# EAGLE board PCB 1.5 TH (EAGLE 6.5.0)
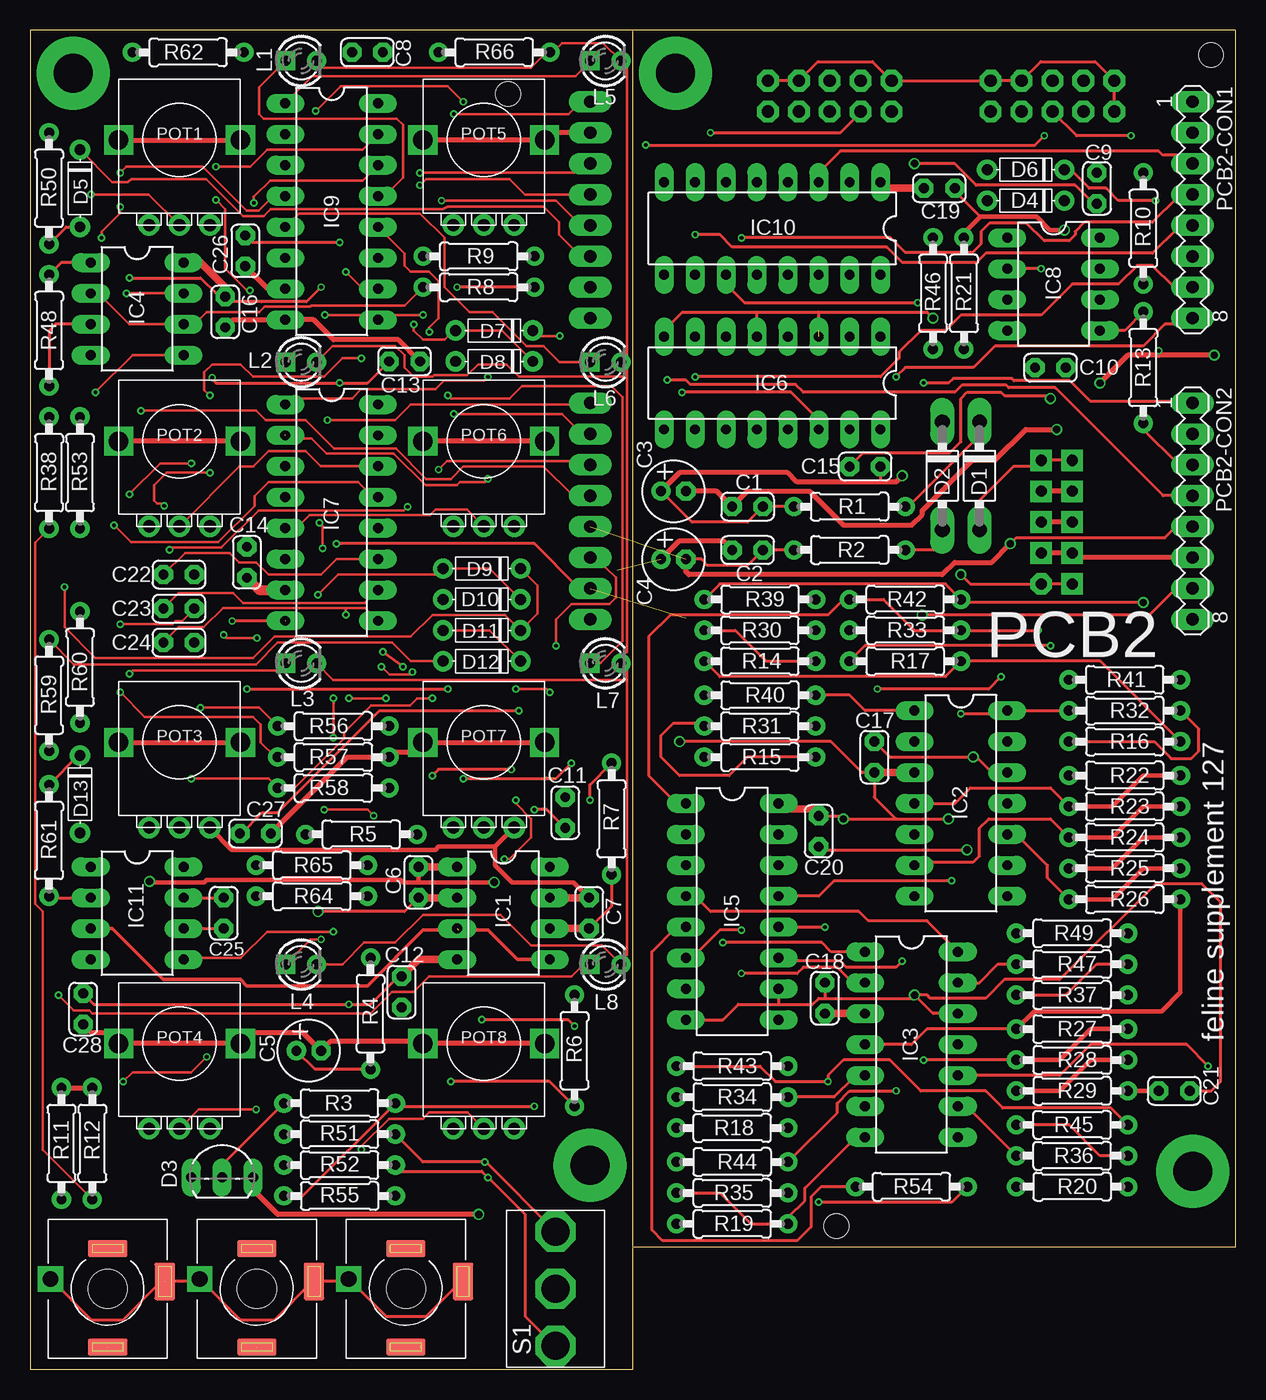
[diagram p0: board, top side]
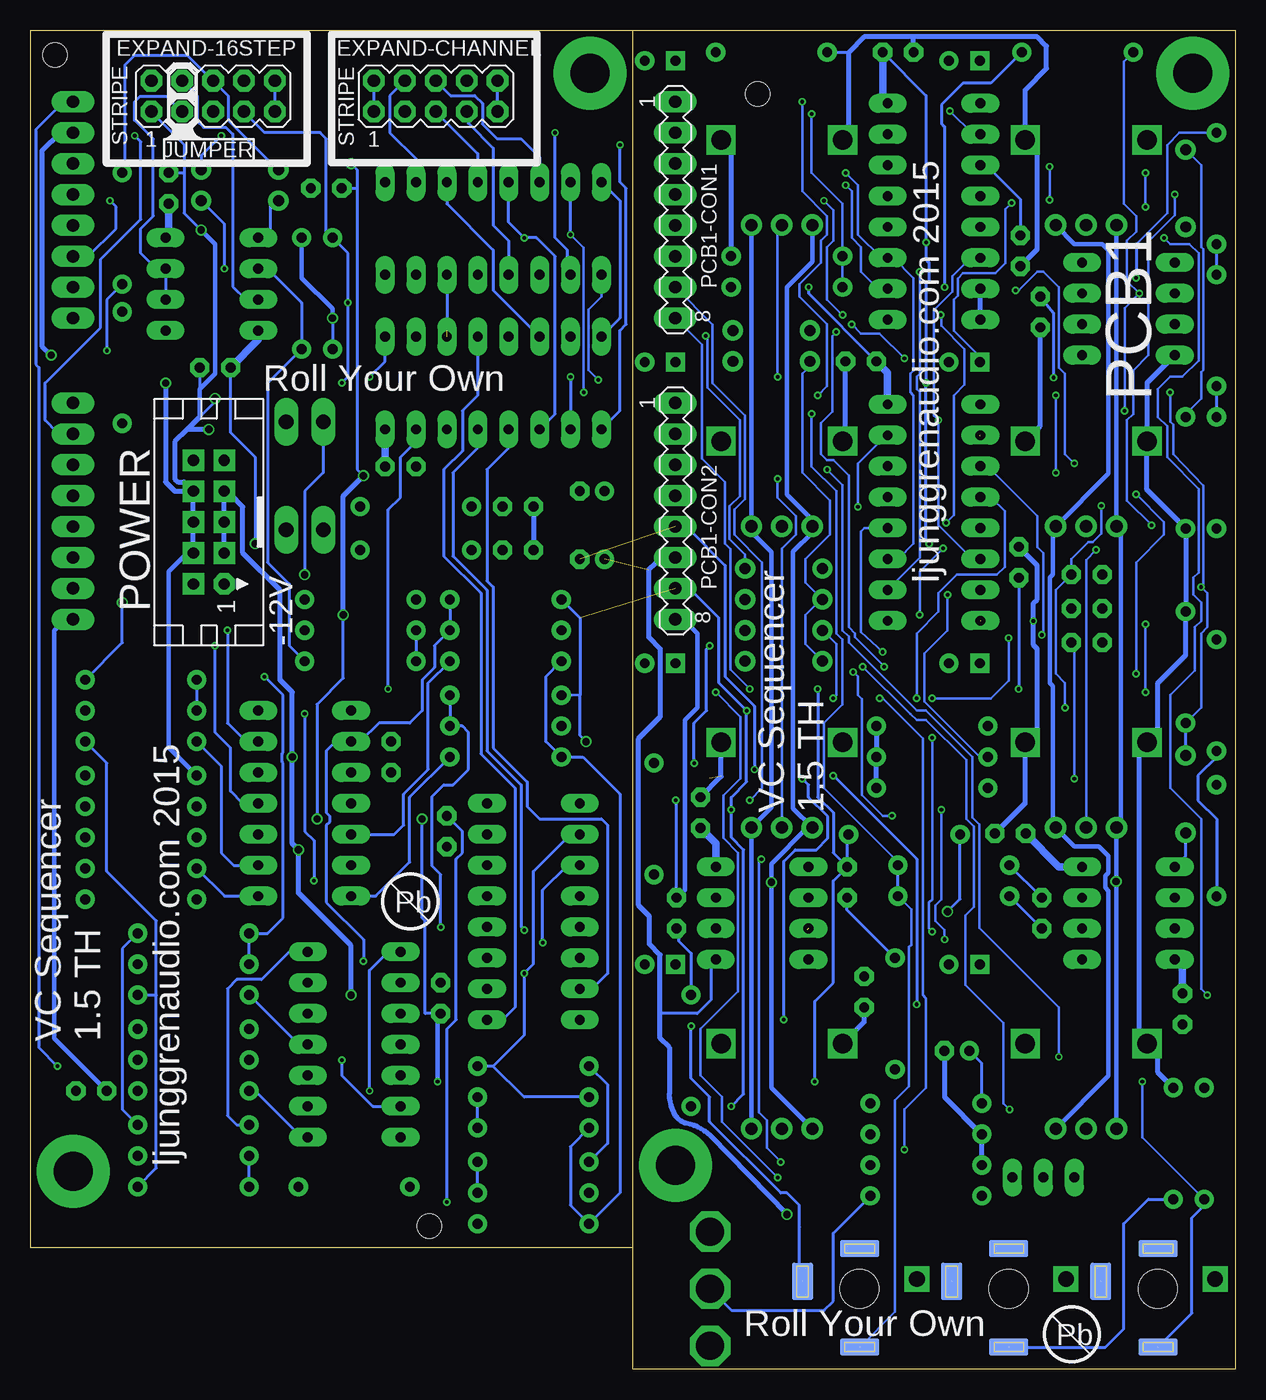
[diagram p1: board, bottom side, seen from below]

Size 99 x 110 mm. Coordinates in mm from the lower left corner, seen from the top.
Outline: 49.5,10 49.5,0 0,0 0,110 49.5,110
Outline: 49.5,10 49.5,110
Outline: 49.5,110 99,110 99,10 49.5,10
Copper layers (1*16): Top 0.035mm / dielectric 1.5mm / Bottom 0.035mm
Design rules "hackvana 15 mil pads 24 mil thermal": minimum track width 6mil, minimum drill 0.3mm, track to track 6mil, track to pad 6mil, pad to pad 6mil, via to via 6mil, smd to smd 0mil, copper to edge 6mil, drill to drill 6mil, minimum pad ring 15mil, minimum via ring 6mil, stop-mask expansion 2mil, vias tented up to drill 100mil, thermal gap 24mil
Holes 3.2 mm at 6.36,6.6 18.61,6.6 30.87,6.6
Holes 2 mm at 97,108 66.23,11.75 39.25,104.78

## Footprints (pad centres in the part's own frame; a part is rotated, then mirrored left to right if it is on the bottom)
C025-024X044 = drill 0.813 octagon: 1 -1.27,0; 2 1.27,0
E2-5 = drill 0.813 pad 1.27: + -1.016,0 | drill 0.813 pad 1.27 octagon: - 1.016,0
ERTHENVAR-SLOTS = smd 3.2 x 1.4 bottom: NORMLB 0,-3.3; TIPB 0,4.8 | smd 3.2 x 1.4: NORMLT 0,-3.3; TIPT 0,4.8 | smd 1.7 x 3.1 bottom: RING1B -4.7,-0.6 | smd 1.7 x 3.1: RING1T -4.7,-0.6 | drill 1.3 pad 1.778 square: RING2H 4.7,-0.8
DO41-7 = drill 1.2 pad 1.6 long: A 4.445,0; C -4.445,0
TO92-LINE = drill 0.813 long: 1 2.54,0; 2 0,0; 3 -2.54,0
DO35-6 = drill 0.9: ANODE 3.175,0; CATHODE -3.175,0
MA05-2 = drill 1.016 octagon: 1 -5.08,-1.27; 2 -5.08,1.27; 3 -2.54,-1.27; 4 -2.54,1.27; 5 0,-1.27; 6 0,1.27; 7 2.54,-1.27; 8 2.54,1.27; 9 5.08,-1.27; 10 5.08,1.27
DIL08 = drill 0.813 pad 1.27 long: 1 -3.81,-3.81; 2 -1.27,-3.81; 3 1.27,-3.81; 4 3.81,-3.81; 5 3.81,3.81; 6 1.27,3.81; 7 -1.27,3.81; 8 -3.81,3.81
DIL14 = drill 0.813 long: 1 -7.62,-3.81; 2 -5.08,-3.81; 3 -2.54,-3.81; 4 0,-3.81; 5 2.54,-3.81; 6 5.08,-3.81; 7 7.62,-3.81; 8 7.62,3.81; 9 5.08,3.81; 10 2.54,3.81; 11 0,3.81; 12 -2.54,3.81; 13 -5.08,3.81; 14 -7.62,3.81
DIL16 = drill 0.813 long: 1 -8.89,-3.81; 2 -6.35,-3.81; 3 -3.81,-3.81; 4 -1.27,-3.81; 5 1.27,-3.81; 6 3.81,-3.81; 7 6.35,-3.81; 8 8.89,-3.81; 9 8.89,3.81; 10 6.35,3.81; 11 3.81,3.81; 12 1.27,3.81; 13 -1.27,3.81; 14 -3.81,3.81; 15 -6.35,3.81; 16 -8.89,3.81
LED3MM = drill 0.813 square: A -1.27,0 | drill 0.813: K 1.27,0
MA08-1 = drill 1.016 long: 1 -8.89,0; 2 -6.35,0; 3 -3.81,0; 4 -1.27,0; 5 1.27,0; 6 3.81,0; 7 6.35,0; 8 8.89,0
POT-ALPHA9 = drill 1.6 pad 2.184 square: GND$1 -5,0; GND$2 5,0 | drill 1: LEFT -2.5,-7; MID 0,-7; RIGHT 2.5,-7
CON10L = drill 0.914 pad 1.778 octagon: 1 5.08,1.27 | drill 0.914 pad 1.778 square: 2 5.08,-1.27; 3 2.54,1.27; 4 2.54,-1.27; 5 0,1.27; 6 0,-1.27; 7 -2.54,1.27; 8 -2.54,-1.27; 9 -5.08,1.27; 10 -5.08,-1.27
0207/9 = drill 0.813: 1 -4.58,0; 2 4.58,0
SPDT-HORIZONTAL-TOP-SUBMINI-MULTICOMP = drill 2.3 pad 3.1 octagon: 1 4.7,0; 2 0,0; 3 -4.7,0

## Placement (x,y rotation side)
C1  100nF  [C025-024X044]  58.94,70.87 180 top
C2  100nF  [C025-024X044]  58.94,67.31 0 top
C3  10uF  [E2-5]  52.84,72.14 0 top
C4  10uF  [E2-5]  52.84,66.55 0 top
C5  10uF  [E2-5]  22.87,26.16 0 top
C6  100nF  [C025-024X044]  31.88,40.01 270 top
C7  100nF  [C025-024X044]  45.92,37.47 270 top
C8  100nF  [C025-024X044]  27.69,108.2 0 top
C9  100nF  [C025-024X044]  87.64,97.03 270 top
C10  100nF  [C025-024X044]  83.83,82.3 0 top
C11  100nF  [C025-024X044]  43.95,45.72 270 top
C12  100nF  [C025-024X044]  30.49,30.99 270 top
C13  100nF  [C025-024X044]  30.74,82.8 180 top
C14  100nF  [C025-024X044]  17.79,66.29 90 top
C15  100nF  [C025-024X044]  68.59,74.17 0 top
C16  100nF  [C025-024X044]  16.01,86.87 90 top
C17  100nF  [C025-024X044]  69.35,50.29 270 top
C18  100nF  [C025-024X044]  65.29,30.48 270 top
C19  100nF  [C025-024X044]  74.68,97.03 180 top
C20  100nF  [C025-024X044]  64.78,44.2 90 top
C21  100nF  [C025-024X044]  93.99,22.86 180 top
C22  1nF  [C025-024X044]  12.2,65.28 180 top
C23  1nF  [C025-024X044]  12.2,62.48 180 top
C24  1nF  [C025-024X044]  12.2,59.69 180 top
C25  15pF  [C025-024X044]  15.88,37.47 270 top
C26  100nF  [C025-024X044]  17.66,91.88 90 top
C27  100nF  [C025-024X044]  18.49,44.01 180 top
C28  100nF  [C025-024X044]  4.33,29.59 270 top
CV/CLK-IN  ERTHENVAR_3.5MM_JACKSLOTS  [ERTHENVAR-SLOTS]  6.35,6.6 180 top
D1  1N5818  [DO41-7]  77.99,73.41 270 top
D2  1N5818  [DO41-7]  74.94,73.41 270 top
D3  LM4040 5V  [TO92-LINE]  15.76,15.75 0 top
D4  1N4148  [DO35-6]  81.8,96.01 180 top
D5  1N4148  [DO35-6]  4.07,97.03 270 top
D6  1N4148  [DO35-6]  81.8,98.55 180 top
D7  1N4148  [DO35-6]  38.11,85.34 180 top
D8  1N4148  [DO35-6]  38.11,82.8 180 top
D9  1N4148  [DO35-6]  37.09,65.79 180 top
D10  1N4148  [DO35-6]  37.09,63.25 180 top
D11  1N4148  [DO35-6]  37.09,60.71 180 top
D12  1N4148  [DO35-6]  37.09,58.17 180 top
D13  1N4148  [DO35-6]  4.07,47.24 270 top
EXPAND-16STEP  [MA05-2]  83.99,104.6 0 bottom
EXPAND-CHANNEL  [MA05-2]  65.69,104.6 0 bottom
IC1  LM358  [DIL08]  38.87,37.47 270 top
IC2  LM339  [DIL14]  76.46,46.48 270 top
IC3  LM339  [DIL14]  72.4,26.67 270 top
IC4  LM393  [DIL08]  8.77,87.12 270 top
IC5  4532N  [DIL16]  57.67,37.59 270 top
IC6  CD4516  [DIL16]  60.97,81.03 180 top
IC7  CD4051  [DIL16]  24.75,70.38 270 top
IC8  TL072  [DIL08]  84.08,89.15 270 top
IC9  CD4051  [DIL16]  24.75,95.12 270 top
IC10  4050N  [DIL16]  60.97,93.73 180 top
IC11  TL072  [DIL08]  8.77,37.47 270 top
L1  Amber  [LED3MM]  22.25,107.5 0 top
L2  Amber  [LED3MM]  22.25,82.75 0 top
L3  Amber  [LED3MM]  22.25,58 0 top
L4  Amber  [LED3MM]  22.25,33.25 0 top
L5  Amber  [LED3MM]  47.25,107.5 0 top
L6  Amber  [LED3MM]  47.25,82.75 0 top
L7  Amber  [LED3MM]  47.25,58 0 top
L8  Amber  [LED3MM]  47.25,33.25 0 top
OUT  ERTHENVAR_3.5MM_JACKSLOTS  [ERTHENVAR-SLOTS]  30.85,6.6 180 top
PCB1-CON1  [MA08-1]  46,95.25 270 bottom
PCB1-CON2  [MA08-1]  46,70.5 270 bottom
PCB2-CON1  [MA08-1]  95.5,95.25 270 top
PCB2-CON2  [MA08-1]  95.5,70.5 270 top
POT1  100K  [POT-ALPHA9]  12.25,101 0 top
POT2  100K  [POT-ALPHA9]  12.25,76.25 0 top
POT3  100K  [POT-ALPHA9]  12.25,51.5 0 top
POT4  100K  [POT-ALPHA9]  12.25,26.75 0 top
POT5  100K  [POT-ALPHA9]  37.25,101 0 top
POT6  100K  [POT-ALPHA9]  37.25,76.25 0 top
POT7  100K  [POT-ALPHA9]  37.25,51.5 0 top
POT8  100K  [POT-ALPHA9]  37.25,26.75 0 top
POWER  [CON10L]  84.34,69.6 270 bottom
R1  10R  [0207/9]  67.32,70.87 180 top
R2  10R  [0207/9]  67.32,67.31 180 top
R3  4.7K  [0207/9]  25.41,21.84 0 top
R4  27K  [0207/9]  27.95,29.21 270 top
R5  27K  [0207/9]  27.19,43.94 0 top
R6  27K  [0207/9]  44.71,26.16 270 top
R7  27K  [0207/9]  47.76,45.21 90 top
R8  100K  [0207/9]  36.84,88.9 0 top
R9  27K  [0207/9]  36.84,91.44 0 top
R10  1M  [0207/9]  91.45,93.73 90 top
R11  100K  [0207/9]  2.55,18.54 270 top
R12  100K  [0207/9]  5.09,18.54 270 top
R13  27K  [0207/9]  91.45,82.3 90 top
R14  2.2K  [0207/9]  59.95,58.17 0 top
R15  2.2K  [0207/9]  59.95,50.29 0 top
R16  2.2K  [0207/9]  89.92,51.56 180 top
R17  2.2K  [0207/9]  71.89,58.17 180 top
R18  2.2K  [0207/9]  57.67,19.81 0 top
R19  2.2K  [0207/9]  57.67,11.94 0 top
R20  2.2K  [0207/9]  85.61,14.99 180 top
R21  4.7K  [0207/9]  76.72,88.39 90 top
R22  2.2K  [0207/9]  89.92,48.77 180 top
R23  2.2K  [0207/9]  89.92,46.23 180 top
R24  2.2K  [0207/9]  89.92,43.69 180 top
R25  2.2K  [0207/9]  89.92,41.15 180 top
R26  2.2K  [0207/9]  89.92,38.61 180 top
R27  2.2K  [0207/9]  85.61,27.94 180 top
R28  2.2K  [0207/9]  85.61,25.4 180 top
R29  2.2K  [0207/9]  85.61,22.86 180 top
R30  1M  [0207/9]  59.95,60.71 0 top
R31  1M  [0207/9]  59.95,52.83 0 top
R32  1M  [0207/9]  89.92,54.1 180 top
R33  1M  [0207/9]  71.89,60.71 0 top
R34  1M  [0207/9]  57.67,22.35 180 top
R35  1M  [0207/9]  57.67,14.48 0 top
R36  1M  [0207/9]  85.61,17.53 0 top
R37  27K  [0207/9]  85.61,30.73 180 top
R38  27K  [0207/9]  1.53,73.66 90 top
R39  27K  [0207/9]  59.95,63.25 180 top
R40  27K  [0207/9]  59.95,55.37 180 top
R41  27K  [0207/9]  89.92,56.64 0 top
R42  27K  [0207/9]  71.89,63.25 0 top
R43  27K  [0207/9]  57.67,24.89 180 top
R44  27K  [0207/9]  57.67,17.02 180 top
R45  27K  [0207/9]  85.61,20.07 0 top
R46  1M  [0207/9]  74.18,88.39 90 top
R47  1M  [0207/9]  85.61,33.27 180 top
R48  1M  [0207/9]  1.53,85.34 90 top
R49  27K  [0207/9]  85.61,35.81 0 top
R50  27K  [0207/9]  1.53,97.03 90 top
R51  1M  [0207/9]  25.41,19.3 0 top
R52  1M  [0207/9]  25.41,16.76 0 top
R53  1M  [0207/9]  4.07,73.66 90 top
R54  100K  [0207/9]  72.4,14.99 0 top
R55  100K  [0207/9]  25.41,14.22 180 top
R56  100K  [0207/9]  24.9,52.83 0 top
R57  100K  [0207/9]  24.9,50.29 0 top
R58  100K  [0207/9]  24.9,47.75 0 top
R59  100K  [0207/9]  1.53,55.37 270 top
R60  100K  [0207/9]  4.07,57.66 90 top
R61  100K  [0207/9]  1.53,43.43 90 top
R62  27K  [0207/9]  12.96,108.2 0 top
R64  100K  [0207/9]  23.12,38.86 0 top
R65  1K  [0207/9]  23.12,41.4 0 top
R66  2.2K  [0207/9]  38.11,108.2 0 top
R-IN  ERTHENVAR_3.5MM_JACKSLOTS  [ERTHENVAR-SLOTS]  18.6,6.6 180 top
S1  SPDT on-off-on  [SPDT-HORIZONTAL-TOP-SUBMINI-MULTICOMP]  43.15,6.6 270 top

## Library data of the parts
C1-C28 CV/CLK-IN D1-D13 IC1-IC11 L1-L8 OUT POT1-POT8 R1-R62 R64-R66 R-IN S1 = Roll Your Own
EXPAND-16STEP EXPAND-CHANNEL PCB1-CON1 PCB1-CON2 PCB2-CON1 PCB2-CON2 POWER = Roll Your Own; OC_FARNELL: unknown; OC_NEWARK: unknown

## Nets
0V: C1.2 C2.1 C3.- C4.+ C5.- C8.1 C9.1 C10.2 C11.1 C12.2 C13.1 C14.2 C15.1 C16.1 C17.1 C18.1 C19.1 C20.1 C21.1 C26.1 C27.1 C28.2 CV/CLK-IN.RING1B CV/CLK-IN.RING1T CV/CLK-IN.RING2H D3.1 EXPAND-16STEP.1 EXPAND-16STEP.2 EXPAND-16STEP.8 EXPAND-16STEP.9 EXPAND-16STEP.10 EXPAND-CHANNEL.1 EXPAND-CHANNEL.2 EXPAND-CHANNEL.8 EXPAND-CHANNEL.9 EXPAND-CHANNEL.10 IC1.3 IC1.5 IC2.12 IC3.12 IC4.4 IC5.8 IC5.10 IC6.3 IC6.5 IC6.8 IC7.8 IC9.7 IC9.8 IC10.8 IC10.14 IC11.3 OUT.RING1B OUT.RING1T OUT.RING2H PCB1-CON1.2 PCB1-CON2.6 PCB2-CON1.2 PCB2-CON2.6 POT1.GND$1 POT1.GND$2 POT2.GND$1 POT2.GND$2 POT3.GND$1 POT3.GND$2 POT4.GND$1 POT4.GND$2 POT5.GND$1 POT5.GND$2 POT6.GND$1 POT6.GND$2 POT7.GND$1 POT7.GND$2 POT8.GND$1 POT8.GND$2 POWER.3 POWER.4 POWER.5 POWER.6 POWER.7 POWER.8 R9.2 R10.1 R11.1 R12.1 R21.2 R22.2 R46.1 R51.1 R52.1 R53.1 R56.2 R57.2 R58.2 R60.2 R66.1 R-IN.RING1B R-IN.RING1T R-IN.RING2H
5V_REF: C21.2 PCB2-CON2.8 R29.1
+5V: C7.1 IC1.7 PCB1-CON2.8 POT1.RIGHT POT2.RIGHT POT3.RIGHT POT4.RIGHT POT5.RIGHT POT6.RIGHT POT7.RIGHT POT8.RIGHT R7.2
+12V: C1.1 C3.+ C8.2 C9.2 C11.2 C13.2 C15.2 C16.2 C17.2 C18.2 C19.2 C20.2 C26.2 C27.2 IC1.8 IC2.3 IC3.3 IC4.8 IC5.16 IC6.16 IC7.16 IC8.8 IC9.3 IC9.16 IC10.1 IC11.8 PCB1-CON2.7 PCB2-CON2.7 R1.2 R3.2 R8.2 R39.2 R40.2 R41.2 R42.2 R43.2 R44.2 R45.2 R49.2 R50.2 R54.2 R55.2 R62.2
-5V: C6.1 C14.1 IC1.1 IC7.7 POT1.LEFT POT2.LEFT POT3.LEFT POT4.LEFT POT5.LEFT POT6.LEFT POT7.LEFT POT8.LEFT R5.2 R6.2
-12V: C2.2 C4.- C10.1 C12.1 C28.1 IC1.4 IC8.4 IC11.4 PCB1-CON2.5 PCB2-CON2.5 R2.2
BUS_A1: C22.2 IC7.11 IC9.11 PCB1-CON1.3
BUS_A2: IC6.6 IC10.3 PCB2-CON1.3
BUS_B1: C23.2 IC7.10 IC9.10 PCB1-CON1.4
BUS_B2: IC6.11 IC10.5 PCB2-CON1.4
BUS_C1: C24.2 IC7.9 IC9.9 PCB1-CON1.5
BUS_C2: IC6.14 IC10.7 PCB2-CON1.5
COMP_REF_1: IC4.2 IC4.6 PCB1-CON1.1 R8.1 R9.1
COMP_REF_2: IC3.10 PCB2-CON1.1
CV/CLK-IN: EXPAND-16STEP.3 IC8.6 IC8.7
CV/CLOCK-FROM-EXP: EXPAND-16STEP.4 IC8.3
CV/CLOCK-IN1: CV/CLK-IN.TIPB CV/CLK-IN.TIPT PCB1-CON2.3 R11.2
CV/CLOCK-IN2: PCB2-CON2.3 R13.1
DISABLE1: IC7.6 IC9.6 PCB1-CON2.1
DISABLE2: EXPAND-16STEP.7 IC10.11 PCB2-CON2.1 R46.2
N$1: D4.CATHODE IC8.2 R14.1 R15.1 R16.1 R17.1 R18.1 R19.1 R20.1 R21.1 R37.1
N$3: C25.2 IC11.6 R64.1
N$4: R12.2 R38.1 R-IN.TIPB R-IN.TIPT
N$5: D4.ANODE IC8.1
N$6: C7.2 IC1.6 R6.1 R7.1
N$7: IC8.5 R13.2
N$8: IC3.11 R37.2 R47.1
N$11: D8.ANODE D10.ANODE D12.ANODE R59.1
N$12: IC4.3 R38.2 R48.1
N$13: IC5.5 R54.1
N$14: D5.ANODE IC4.1 R48.2 R50.1
N$15: L1.K L2.K L3.K L4.K L5.K L6.K L7.K L8.K R66.2
N$16: IC2.2 IC5.11 R30.2 R39.1
N$17: IC3.13 IC6.15 R47.2 R49.1
N$18: IC7.4 POT8.MID
N$19: IC7.2 POT7.MID
N$20: IC7.5 POT6.MID
N$21: IC7.1 POT5.MID
N$22: IC7.12 POT4.MID
N$23: IC7.15 POT3.MID
N$24: IC7.14 POT2.MID
N$25: IC7.13 POT1.MID
N$26: IC2.5 R14.2 R30.1
N$27: D1.A POWER.9 POWER.10
N$28: D1.C R1.1
N$29: D2.A R2.1
N$30: R55.1 S1.2
N$31: C6.2 IC1.2 R4.1 R5.1
N$33: D2.C POWER.1 POWER.2
N$35: IC2.4 R22.1 R23.2
N$36: IC2.1 IC5.12 R31.2 R40.1
N$37: IC2.7 R15.2 R31.1
N$38: IC2.6 R23.1 R24.2
N$39: C5.+ D3.2 R3.1 R4.2
N$40: IC2.14 IC5.13 R32.2 R41.1
N$41: IC2.9 R16.2 R32.1
N$42: IC7.3 IC11.5
N$43: C22.1 D7.ANODE D8.CATHODE R56.1
N$44: IC2.8 R24.1 R25.2
N$45: IC2.13 IC5.1 R33.2 R42.1
N$46: IC2.11 R17.2 R33.1
N$47: IC2.10 R25.1 R26.2
N$48: C23.1 D9.ANODE D10.CATHODE R57.1
N$49: IC3.2 IC5.2 R34.2 R43.1
N$50: IC3.5 R18.2 R34.1
N$51: IC3.4 R26.1 R27.2
N$52: C24.1 D11.ANODE D12.CATHODE R58.1
N$53: IC3.1 IC5.3 R35.2 R44.1
N$54: IC3.7 R19.2 R35.1
N$55: D13.ANODE IC11.1
N$56: IC3.6 R27.1 R28.2
N$57: IC3.14 IC5.4 R36.2 R45.1
N$58: IC3.9 R20.2 R36.1
N$59: IC3.8 R28.1 R29.2
N$60: IC11.2 R59.2 R61.1
N$61: D7.CATHODE D9.CATHODE D11.CATHODE D13.CATHODE IC4.5 R60.1 R61.2
N$62: EXPAND-CHANNEL.4 IC10.2
N$63: EXPAND-CHANNEL.6 IC10.6
N$64: EXPAND-CHANNEL.5 IC10.4
N$65: EXPAND-CHANNEL.3 IC10.10
N$66: EXPAND-CHANNEL.7 IC10.12
N$93: C25.1 IC11.7 R65.1
OUT1: OUT.TIPB OUT.TIPT PCB1-CON2.2 R64.2 R65.2
OUT2: EXPAND-16STEP.5 PCB2-CON2.2
PE1: PCB1-CON1.8 R52.2 S1.1
PE2: IC6.1 PCB2-CON1.8
PRESET_A: IC5.9 IC6.4
PRESET_B: IC5.7 IC6.12
PRESET_C: IC5.6 IC6.13
RESET1: D5.CATHODE PCB1-CON1.6 R53.2
RESET2: D6.CATHODE IC6.9 PCB2-CON1.6
RESET-EXP: D6.ANODE EXPAND-16STEP.6 R10.2
STEP1: IC9.13 L1.A
STEP2: IC9.14 L2.A
STEP3: IC9.15 L3.A
STEP4: IC9.12 L4.A
STEP5: IC9.1 L5.A
STEP6: IC9.5 L6.A
STEP7: IC9.2 L7.A
STEP8: IC9.4 L8.A
TRIGS1: IC4.7 PCB1-CON2.4 R62.1
TRIGS2: IC10.9 PCB2-CON2.4
U/D1: PCB1-CON1.7 R51.2 S1.3
U/D2: IC6.10 PCB2-CON1.7

## Tracks (layer width: path | path; a pad name or v marks a point on that pad's centre or on a via)
0V  (via drill 0.3, 0.6)  (8 unrouted)
  Top 0.22: v43.19,59.44 43.19,61.59 44.46,62.87 47.57,62.87 48.11,63.41 48.11,65.05 46.41,66.69
  Top 0.254: CV/CLK-IN.RING2H 4.99,4.06 7.63,4.06 10.76,7.2 CV/CLK-IN.RING1T 13.7,7.2 R-IN.RING2H 17.24,4.06 20.07,4.06 23.21,7.2 R-IN.RING1T 25.95,7.2 OUT.RING2H 29.23,4.32 32.52,4.32 35.4,7.2 OUT.RING1T | 20.92,61.47 v16.58,61.47 | EXPAND-CHANNEL.10 EXPAND-CHANNEL.8 64.72,107.44 69.2,107.44 EXPAND-CHANNEL.2 EXPAND-16STEP.10 EXPAND-16STEP.8 83.02,107.44 87.5,107.44 EXPAND-16STEP.2 EXPAND-16STEP.1 | C19.1 75.95,96.77 78.05,94.68 | C15.1 68.46,75.31 75.57,75.31 76.46,76.2 76.46,79.76 76.97,80.26 79.76,80.26 80.02,80.01 83.57,80.01 v83.83,79.76 | IC6.8 52.08,85.34 53.6,86.87 59.7,86.87 | 59.7,86.87 64.78,86.87 | 64.78,86.87 73.67,86.87 v74.18,86.36 | IC6.5 59.7,86.87 | IC6.3 64.78,86.87 | R21.2 76.72,93.34 | v92.72,83.69 92.72,83.31 | C17.1 70.62,50.29 v77.48,50.29 77.73,50.29 79,49.02 IC2.12 | C20.1 65.03,42.67 v76.97,42.67 | IC3.12 74.18,29.21 v72.65,30.73 | C18.1 65.29,30.48 | 65.29,30.48 72.4,30.48 v72.65,30.73 | 65.29,30.48 64.78,30.48 64.27,29.97 61.48,29.97 | IC5.8 56.9,28.7 58.17,29.97 61.48,29.97 | IC5.10 61.48,29.97 | v72.65,30.73 73.67,30.73 73.92,30.48 78.49,30.48 80.02,32 84.59,32 92.46,39.88 96.27,39.88 97.8,38.35 97.8,23.62 97.04,22.86 C21.1 | v44.71,28.19 44.2,28.7 v37.09,28.7 | v35.57,48.51 43.19,48.51 v44.46,49.78 | 46.41,66.69 PCB1-CON2.6
  Top 0.3: IC1.5 40.01,33.66 37.6,36.07 35.19,36.07 | 34.93,36.07 32.27,36.07 27.69,31.5 17.79,31.5 17.28,32 10.93,32 6.74,36.2 IC11.3
  Top 0.35: v84.97,93.6 83.76,93.6 82.69,94.68 78.05,94.68 76.72,93.34
  Top 0.406: v36.84,12.7 20.33,12.7 18.23,14.8 18.23,16.19 D3.1 | IC1.3 34.93,36.07 | PCB1-CON1.2 42.93,101.6 42.33,101 POT5.GND$2 POT5.GND$1 | POT1.GND$1 POT1.GND$2 | C26.1 19.51,88.77 IC9.7 | C16.1 16.64,86.23 IC9.8 23.25,86.23 24.9,84.58 30.23,84.58 C13.1 | POT6.GND$2 POT6.GND$1 | POT2.GND$2 POT2.GND$1 | POT3.GND$1 POT3.GND$2 | C28.2 4.96,27.69 6.36,27.69 7.25,26.79 POT4.GND$1 POT4.GND$2 18.19,27.69 22.36,27.69 C5.- 24.65,26.92 32.08,26.92 POT8.GND$1 POT8.GND$2 | R11.1 R12.1 | POT7.GND$2 POT7.GND$1 31.42,50.67 29.85,50.67 R57.2 26.04,50.29 C27.1 | POWER.3 POWER.4 85.97,66.69 PCB2-CON2.6 | POWER.6 POWER.5 | POWER.8 POWER.7 | v97.29,83.31 92.72,83.31 90.18,83.31 v87.89,81.03 | C3.- 56.4,72.14 C1.2 58.94,72.14 64.02,72.14 66.81,69.34 72.4,69.34 73.29,70.23 73.29,70.55 77.42,74.68 79.26,74.68 81.8,77.22 v84.34,77.22 | C4.+ 53.35,68.07 56.9,68.07 C2.1
  Bottom 0.254: 18.23,16.19 D3.1 | EXPAND-CHANNEL.9 EXPAND-CHANNEL.10 | EXPAND-CHANNEL.1 EXPAND-CHANNEL.2 | EXPAND-16STEP.9 EXPAND-16STEP.10 | C10.2 85.1,80.52 | C9.1 86.37,98.3 | 86.37,98.3 86.37,95 v84.97,93.6 | EXPAND-16STEP.1 86.37,100.63 86.37,98.3 | v83.83,79.76 83.83,79.5 85.1,78.23 | IC10.8 50.55,96.01 50.55,86.36 IC6.8 | IC10.14 64.78,85.34 | v74.18,86.36 R46.1 | R10.1 92.72,87.88 v92.72,83.69 | 82.56,71.88 82.81,71.88 POWER.7 | 35.8,7.45 35.8,11.67 35.82,11.94 35.82,13.46 36.84,14.48 37.35,14.48 43.19,20.32 43.19,22.35 44.71,23.88 v44.71,28.19 | 43.06,33.66 43.06,30.35 44.2,29.21 47.25,29.21 | v37.09,28.7 37.09,41.72 36.14,42.67 34.42,42.67 33.47,43.62 33.47,45.4 35.06,46.99 35.06,48.01 v35.57,48.51 | v44.46,49.78 44.46,53.09 43.44,54.1 43.44,59.18 v43.19,59.44 | R66.1 31.76,108.2
  Bottom 0.35: R22.2 87.64,51.06 87.64,65.53 86.11,67.06 POWER.4 | 85.1,78.23 85.1,80.52 83.83,81.79 83.83,92.46 v84.97,93.6 | R21.2 76.72,89.66 74.18,87.12 v74.18,86.36
  Bottom 0.406: v36.84,12.7 43.12,19.18 arc-31 45.09,20.19 arc45 45.98,20.83 arc27 46.49,22.61 46.49,26.42 47.25,27.18 47.25,29.21 47.25,34.04 48.14,34.92 48.14,37.21 49.03,38.1 49.03,51.82 47.25,53.59 47.25,59.18 48.2,60.13 48.2,65.66 47.11,66.69 PCB1-CON2.6 | 35.8,7.45 OUT.RING1T | 43.06,33.66 IC1.5 | POT5.GND$1 31.76,101.49 31.76,108.2 30.49,109.47 26.42,109.47 | 26.42,109.47 16.26,109.47 15.5,108.71 15.5,106.87 17.25,105.13 POT1.GND$2 16.26,100.01 16.26,92.01 C26.1 | C8.1 26.42,109.47 | IC9.8 IC9.7 | POT5.GND$2 41.42,100.17 R9.2 | IC4.4 7.25,81.02 POT2.GND$1 7.25,72.26 R53.1 R60.2 4.07,58.67 6.36,56.39 6.36,52.39 POT3.GND$1 7.25,51.18 7.88,50.55 7.88,27.38 POT4.GND$1 7.2,26.75 6.36,25.91 6.36,24.39 R12.1 | POT2.GND$2 16.01,77.49 C16.1 | C14.2 16.26,66.04 16.26,63.25 16.58,62.93 v16.58,61.47 16.58,59.5 16.26,59.18 16.26,52.49 POT3.GND$2 17.25,46.51 C27.1 | R52.1 R51.1 23.88,22.35 C5.- | C12.2 30.49,28.51 POT8.GND$1 | R58.2 R57.2 R56.2 | C11.1 42.25,48.69 POT7.GND$2 | C13.1 32.01,76.49 POT6.GND$1 | POWER.3 POWER.5 POWER.7 | POWER.4 POWER.8 | PCB2-CON1.2 96.53,101.6 98.05,100.08 98.05,84.07 v97.29,83.31 | v87.89,81.03 87.89,72.9 87.13,72.14 POWER.8 | 85.1,78.23 86.11,77.22 | POWER.8 86.37,72.9 86.88,72.9 87.13,73.15 87.13,76.2 86.11,77.22 | C1.2 C2.1 | v84.34,77.22 86.11,77.22 | 82.56,71.88 81.54,70.87 81.54,67.06 78.49,64.01 78.49,56.64 77.48,55.63 v77.48,50.29 77.48,43.18 v76.97,42.67 76.97,39.12 72.65,34.8 v72.65,30.73
5V_REF
  Top 0.35: R29.1 C21.2
  Bottom 0.35: PCB2-CON2.8 95.64,61.47 96.27,61.47 97.04,60.71 97.04,27.18 C21.2
+5V  (via drill 0.3)
  Top 0.254: v45.98,46.74 45.98,48.01 R7.2
  Top 0.35: POT3.RIGHT 14.75,44.46 16.54,42.67 33.28,42.67 33.54,42.93 38.18,42.93 | POT7.RIGHT 38.18,42.93 | 38.18,42.93 38.18,41.4 39.57,40.01 44.65,40.01 C7.1
  Top 0.6: IC1.7 C7.1
  Bottom 0.254: C7.1 45.92,46.67 v45.98,46.74
  Bottom 0.35: PCB1-CON2.8 45.86,61.47 45.22,61.47 44.2,60.45 44.2,54.36 45.22,53.34 45.22,39.37 45.85,38.73 C7.1 | POT4.RIGHT 10.42,24.08 10.42,39.31 10.68,39.56 10.68,40.51 10.42,40.77 10.42,42.16 11.18,42.93 13.22,42.93 14.75,44.46 POT3.RIGHT 14.99,44.74 14.99,56.13 15.25,56.39 15.25,65.02 14.99,65.28 14.99,68.83 14.75,69.08 POT2.RIGHT 10.42,73.58 10.42,91.95 10.93,92.46 13.22,92.46 POT1.RIGHT | POT8.RIGHT POT7.RIGHT 38.11,46.14 38.11,67.12 39.76,68.77 POT6.RIGHT POT5.RIGHT
+12V  (via drill 0.3, 0.6)  (1 unrouted)
  Top 0.23: 18.99,87.69 22.68,87.69 22.8,87.82
  Top 0.254: R8.2 v35.06,88.9 | v14.93,81.47 15.25,81.03 v25.41,81.03 27.69,81.03 C13.2 | 18.99,87.69 16.45,87.69 16.01,88.01 C16.2 15.76,88.39 15.25,88.39 13.98,89.66 v8.14,89.66 | 22.8,87.82 v23.88,88.9 | C26.2 18.23,92.58 v25.41,92.58 | PCB1-CON2.7 45.89,64.26 44.97,64.26 41.41,67.82 v25.15,67.82 | C27.2 17.34,44.01 19.06,45.72 20.33,45.72 28.71,54.1 v40.14,54.1 | R55.2 22.37,14.22 R3.2 30.24,21.59 v41.41,21.59 | C11.2 42.43,45.97 v41.41,45.97 | R1.2 C1.1 58.94,69.6 54.36,69.6 C3.+ | C15.2 69.86,72.9 | C9.2 87.38,95.76 85.86,97.28 77.73,97.28 75.95,99.06 v72.65,99.06 | PCB2-CON2.7 94.13,64.15 91.96,61.98 76.46,61.98 | 76.46,61.98 v73.29,61.98 | 76.47,61.98 76.46,61.98 | v53.35,51.56 65.79,51.56 68.33,49.02 C17.2 69.35,46.99 71.13,45.21 | R39.2 56.65,64.52 75.2,64.52 R42.2 76.72,62.99 v91.45,62.99 | R54.2 75.71,13.72 v64.78,13.72 | R43.2 59.95,24.89 61.22,23.62 v65.54,23.62 65.54,24.13 66.81,25.4 70.62,25.4 73.16,22.86 78.49,22.86 79.89,21.46 88.79,21.46 R45.2 | 71.13,45.21 v66.81,45.21 66.56,45.47 C20.2 | 71.13,45.21 v75.45,45.21
  Top 0.406: C3.+ 53.35,73.66 62.24,73.66 63,72.9 69.86,72.9 71.13,72.9 v71.64,73.41
  Top 0.6: C16.2 16.01,88.9 13.98,90.93 IC4.8 | C19.2 70.37,97.03 IC10.1 | IC2.3 C17.2 | IC3.3 C18.2 | IC5.16 61.92,46.04 64.4,46.04 64.46,45.97 64.46,45.78 C20.2
  Bottom 0.22: 8.14,92.46 5.6,95 5.6,100.58 4.57,101.61 R50.2
  Bottom 0.254: v35.06,88.9 35.06,88.39 C13.2 | C16.2 14.93,86.81 v14.93,81.47 | R62.2 20.08,105.66 22.36,105.66 24.14,103.89 24.14,102.36 23.88,102.11 v23.88,88.9 | 8.14,92.46 v8.14,89.66 | IC9.3 20.82,98.81 20.33,98.81 17.66,96.14 C26.2 | C8.2 25.41,104.65 v25.41,92.58 25.41,91.19 25.15,90.93 25.15,89.41 25.41,89.15 v25.41,81.03 25.41,68.07 v25.15,67.82 | PCB1-CON2.7 45.6,63.75 44.46,63.75 42.43,61.72 42.43,56.39 v40.14,54.1 40.14,48.26 41.41,46.99 v41.41,45.97 41.41,43.69 40.39,42.67 40.39,22.61 v41.41,21.59 | C19.2 72.14,97.03 | 72.14,97.03 72.14,73.91 v71.64,73.41 | v72.65,99.06 72.14,98.55 72.14,97.03 | R39.2 53.86,61.73 53.86,55.36 | 53.86,55.36 R40.2 | v53.35,51.56 53.86,52.07 53.86,55.36 | R41.2 91.45,59.7 v91.45,62.99 | v73.29,61.98 73.29,56.77 75.45,54.61 v75.45,45.21 | v66.81,45.21 66.81,37.08 66.56,36.83 66.56,29.21 C18.2 65.54,28.96 | v64.78,13.72 64.78,27.94 64.02,28.7 64.02,41.91 63.51,42.42 63.51,44.2 C20.2 | R43.2 51.57,23.38 51.57,18.53 R44.2 | R49.2 91.45,34.55 91.45,21.34 R45.2
  Bottom 0.35: v65.54,23.62 65.54,28.96
  Bottom 0.406: v73.29,61.98 73.29,71.75 v71.64,73.41
  Bottom 0.6: IC7.16 28.56,81.89 C13.2 | C27.2 14.49,41.27 IC11.8 | IC1.8 42.68,43.18 C11.2 | IC9.16 28.96,104.41 C8.2 | IC6.16 C15.2 | IC8.8 87.64,93.22 C9.2
-5V  (via drill 0.3, 0.6)
  Top 0.254: v17.79,55.88 v34.3,55.88 | R6.2 42.67,23.62 v34.55,23.62
  Top 0.35: 9.85,40.01 14.3,40.01 14.49,40.2 30.42,40.2 30.61,40.01 32.01,40.01 | 32.01,40.01 v38.11,40.01 | C6.1 31.88,40.13 32.01,40.01
  Top 0.406: v9.79,40.07 9.85,40.01
  Top 0.6: IC1.1 C6.1
  Top 0.813: C14.1 18.78,64.03 IC7.7
  Bottom 0.254: C14.1 v17.79,55.88 | v34.3,55.88 34.3,46.99 33.03,45.72 33.03,42.42 C6.1 | R5.2 31.88,43.82 C6.1 | v34.55,23.62 34.55,30.23 33.03,31.75 33.03,40.13 C6.1
  Bottom 0.35: POT5.LEFT 34.75,90.99 36.84,88.9 36.84,71.85 34.75,69.76 POT6.LEFT 34.75,68.74 36.33,67.16 36.33,46.08 POT7.LEFT 35.01,44.5 35.19,44.45 38.11,41.52 v38.11,40.01 38.11,23.11 POT8.LEFT | 9.75,40.1 POT3.LEFT 9.41,44.84 9.41,68.83 9.75,69.18 POT2.LEFT POT1.LEFT | 9.79,19.79 v9.79,40.07
  Bottom 0.406: 9.75,40.1 v9.79,40.07 | POT4.LEFT 9.79,19.79
-12V  (via drill 0.3, 0.6)  (1 unrouted)
  Top 0.254: C28.1 5.21,29.97 v26.17,29.97 27.95,29.97 30.23,32.26 C12.1 | v39.51,49.28 33.54,49.28 v33.03,48.77 | R2.2 C2.2 58.94,66.04 55.63,66.04 55.13,66.55 C4.- | 95.39,69.34 PCB2-CON2.5 94.13,69.23 93.23,68.33 81.03,68.33 v80.53,67.82
  Top 0.406: C4.- 53.86,65.53 54.11,65.28 74.94,65.28 75.95,66.29 79,66.29 v80.53,67.82
  Top 0.6: C12.1 31.88,33.66 IC1.4
  Bottom 0.254: PCB1-CON2.5 45.86,69.09 44.97,69.09 41.92,66.04 41.92,56.9 39.51,54.48 v39.51,49.28 | v33.03,48.77 26.17,41.91 v26.17,29.97 | C10.1 82.56,76.96 80.53,74.93 v80.53,67.82
  Bottom 0.6: C28.1 4.33,33.27 4.71,33.66 IC11.4 | C10.1 80.27,84.58 IC8.4
BUS_A1  (via drill 0.3)
  Top 0.22: PCB1-CON1.3 45.24,98.3 v32.01,98.3 | C22.2 12.71,67.06 16.39,67.06 17.15,66.29 18.55,66.29 19.57,65.28 23.88,65.28 25.18,66.57 IC7.11
  Bottom 0.22: v32.01,98.3 31,97.28 31,93.22 29.09,91.31 IC9.11 28.07,91.31 26.42,89.66 26.42,82.04 26.68,81.79 26.68,80.26 26.42,80.01 26.42,67.82 27.69,66.55 27.95,66.55 27.97,66.57 IC7.11
BUS_A2
  Top 0.254: PCB2-CON1.3 94.8,99.76 93.03,99.76 92.72,100.08 66.56,100.08 64.78,98.3 IC10.3
  Bottom 0.254: IC10.3 64.78,95.76 60.97,91.95 60.97,88.65 IC6.6
BUS_B1  (via drill 0.3)
  Top 0.22: PCB1-CON1.4 40.65,96.52 39.38,97.79 32.52,97.79 v32.01,97.28 | C23.2 12.2,63.75 16.64,63.75 17.47,62.93 27.46,62.93 IC7.10 | v25.92,90.17 27.32,88.77 IC9.10
  Bottom 0.22: v32.01,97.28 31.5,96.77 31.5,92.96 30.74,92.2 30.74,90.17 29.47,88.9 28.69,88.9 IC9.10 | IC7.10 25.92,66.67 25.92,80.26 26.17,80.52 26.17,81.53 25.92,81.79 v25.92,90.17
BUS_B2  (via drill 0.3)
  Top 0.254: PCB2-CON1.4 95.25,96.27 94.24,96.27 92.21,94.23 86.62,94.23 85.86,93.47 85.86,93.22 85.35,92.71 83.32,92.71 81.86,94.17 78.81,94.17 78.11,93.47 78.11,92.46 77.42,91.76 71.89,91.76 70.68,92.96 v58.43,92.96
  Bottom 0.254: IC10.5 59.7,94.23 v58.43,92.96 57.41,92.96 55.89,91.44 55.89,78.49 IC6.11
BUS_C1  (via drill 0.3)
  Top 0.22: PCB1-CON1.5 45.22,93.98 43.19,96.01 v33.79,96.01 | v32.27,86.61 28.94,86.61 IC9.9 28.18,86.61 v24.2,86.61 | C24.2 12.2,60.96 14.23,60.96 15.82,62.55 25.92,62.55 | 25.92,62.55 27.5,62.55 IC7.9 | v23.76,69.53 24.01,69.28 v24.01,67.44 | v25.92,61.98 25.92,62.55
  Bottom 0.22: v33.79,96.01 33.03,95.25 33.03,92.71 33.54,92.2 33.54,87.88 v32.27,86.61 | v24.2,86.61 24.14,86.55 24.14,85.72 22.23,83.82 22.23,80.9 23.12,80.01 23.12,70.17 v23.76,69.53 | v24.01,67.44 25.92,65.53 v25.92,61.98
BUS_C2  (via drill 0.3)
  Top 0.254: PCB2-CON1.5 95.25,93.73 94.24,93.73 92.21,91.69 78.49,91.69 77.73,90.93 71.64,90.93 70.37,92.2 57.67,92.2 56.65,93.22 v54.62,93.22 | IC6.14 64.78,77.98 62.49,80.26 v53.54,80.26
  Bottom 0.22: v53.54,80.26 53.54,92.14 v54.62,93.22
  Bottom 0.254: v54.62,93.22 IC10.7
COMP_REF_1  (via drill 0.3)
  Top 0.22: PCB1-CON1.1 45.22,104.14 44.2,103.12 v34.81,103.12 | R8.1 30.73,87.38 23.06,87.38 23,87.31 19.25,87.31 18.8,86.87 14.49,86.87 13.47,85.85 IC4.6 8.14,85.85 5.85,88.14 5.21,88.14 IC4.2
  Bottom 0.22: v34.81,103.12 34.81,98.3 32.27,95.76 R9.1 R8.1
COMP_REF_2  (via drill 0.3)
  Top 0.254: v96.78,24.89 95,26.67 87.13,26.67 84.59,24.13 IC3.10
  Bottom 0.254: PCB2-CON1.1 95.75,103.89 96.53,103.89 98.56,101.85 98.56,82.55 98.31,82.3 98.31,26.42 v96.78,24.89
CV/CLK-IN
  Bottom 0.254: IC8.6 IC8.7 88.15,90.68 88.91,90.68 89.92,91.69 89.92,93.73 88.91,94.74 88.91,101.09 90.43,102.62 90.43,104.14 89.99,104.58 87.83,104.58 86.57,103.33 EXPAND-16STEP.3
CV/CLOCK-FROM-EXP
  Bottom 0.254: EXPAND-16STEP.4 85.29,104.63 85.29,102.55 84.78,102.04 82.94,102.04 82.37,101.47 82.37,88.96 81.29,87.88 IC8.3
CV/CLOCK-IN1  (via drill 0.3)  (1 unrouted)
  Top 0.22: PCB1-CON2.3 45.7,74.61 34.23,74.61 v33.54,73.91 | v14.49,25.65 13.22,24.38 8.39,24.38 v7.63,23.62
  Bottom 0.22: v33.54,73.91 32.27,72.64 32.27,60.71 31.76,60.2 31.76,59.69 26.17,54.1 25.41,54.1 21.6,50.29 21.6,45.34 21.03,44.77 21.03,36.26 14.49,29.72 v14.49,25.65 | v7.63,23.62 7.63,19.04 R11.2
  Bottom 0.254: CV/CLK-IN.TIPT 3.56,4.59 3.56,12.45 2.55,13.46 R11.2
CV/CLOCK-IN2
  Top 0.254: PCB2-CON2.3 94.35,74.31 91.45,77.22 R13.1
DISABLE1  (via drill 0.3)
  Top 0.22: PCB1-CON2.1 45.86,79.25 31.25,79.25 29.98,77.98 v24.39,77.98
  Bottom 0.22: IC7.6 21.17,66.8 21.85,66.8 24.39,69.34 v24.39,77.98 24.77,78.36 24.77,87 23.25,88.52 23.25,89.79 21.85,91.19 21.06,91.19 IC9.6
DISABLE2  (via drill 0.3)
  Top 0.254: PCB2-CON2.1 95.39,79.5 87.13,79.5 85.42,81.22 80.84,81.22 80.65,81.41 75.83,81.41 75.45,81.03 v73.41,81.03 | IC10.11 57.16,89.15 58.68,87.63 v72.91,87.63
  Bottom 0.254: v73.41,81.03 72.91,81.53 v72.91,87.63 72.91,91.69 R46.2 74.68,93.48 74.68,101.09 75.19,101.6 79.76,101.6 81.45,103.28 EXPAND-16STEP.7
N$1  (via drill 0.3)
  Top 0.254: v83.07,90.42 IC8.2 | R14.1 56.65,56.9 75.2,56.9 R17.1 87.9,58.17 R16.1
  Bottom 0.254: D4.CATHODE 83.07,94.11 v83.07,90.42 | IC8.2 79.51,90.42 76.72,87.63 R21.1 79.51,81.02 79.51,66.29 77.73,64.52 77.73,59.44 R17.1 | R14.1 56.65,56.9 56.65,51.57 R15.1 53.6,50.29 50.55,47.24 50.55,14.48 R19.1 54.62,13.46 54.62,18.28 R18.1 | R20.1 88.65,16.52 88.65,30.73 | R37.1 88.65,30.73 | 88.65,30.73 88.65,36.83 92.72,40.89 92.72,49.78 R16.1
N$3
  Top 0.254: IC11.6 C25.2
  Bottom 0.254: C25.2 R64.1
N$4  (1 unrouted)
  Top 0.22: R12.2 1.02,18.03 1.02,37.59 0.39,38.23 0.39,67.94 R38.1
  Bottom 0.254: R-IN.TIPT 18.58,1.78 10.68,1.78 9.15,3.3 9.15,11.94 7.13,13.96 R12.2
N$5
  Bottom 0.254: IC8.1 79.76,93.47 79.26,93.47 79.26,95.76 79,96.01 D4.ANODE
N$6
  Top 0.254: R7.1 47.76,38.04 C7.2
  Top 0.6: IC1.6 C7.2
  Bottom 0.254: C7.2 45.73,36.01 45.73,35.18 44.71,34.16 R6.1
N$7
  Top 0.254: R13.2 89.92,85.34 IC8.5
N$8
  Top 0.254: R37.2 85.1,30.73 87.64,33.27 R47.1
  Bottom 0.254: IC3.11 76.96,26.67 R37.2
N$11
  Top 0.22: R59.1 3.57,57.91 18.55,57.91 20.33,59.69 29.73,59.69 31.25,58.17 D12.ANODE
  Bottom 0.22: D12.ANODE 35.31,59.56 35.31,61.98 34.04,63.25 D10.ANODE 35.31,64.64 35.31,66.55 33.28,68.58 33.28,71.37 35.57,73.66 35.57,81.79 34.93,82.42 D8.ANODE
N$12
  Top 0.254: IC4.3 2.04,85.85 1.53,85.34 R48.1
  Bottom 0.254: R38.2 R48.1
N$13
  Top 0.254: R54.1 64.97,14.99 64.14,14.16 64.14,11.68 63,10.54 51.95,10.54 51.06,11.43 51.06,34.29 53.09,36.32 IC5.5
N$14
  Top 0.254: R50.1 2.94,93.85 D5.ANODE | IC4.1 2.54,90.93 R48.2
  Bottom 0.254: R48.2 R50.1
N$15
  Top 0.22: L4.K 25.64,33.25 27.44,35.05 29.98,35.05 32.27,37.34 38.62,37.34 41.16,34.8 46.97,34.8 L8.K 48.52,33.53 49.03,34.04 49.03,56.64 | 49.03,56.64 49.03,57.49 L7.K 48.52,58.42 49.03,58.93 49.03,81.53 | L1.K 24.09,106.93 41.16,106.93 42.43,108.2 R66.2 42.93,108.2 43.7,108.97 47.05,108.97 L5.K 49.03,106.99 49.03,83.31 48.52,82.8 L6.K 49.03,82.24 49.03,82.04 49.03,81.53 | L2.K 24.84,84.07 29.98,84.07 30.74,83.31 30.74,82.3 31.5,81.53 33.03,81.53 33.16,81.66 35.89,81.66 36.77,82.55 39.12,82.55 40.14,81.53 49.03,81.53 | L3.K 24.88,56.64 49.03,56.64
N$16  (via drill 0.3)
  Top 0.254: v71.64,33.53 71.13,33.02 67.06,33.02 66.56,33.53 62.49,33.53 62.24,33.78 IC5.11
  Bottom 0.254: R39.1 R30.2 65.79,59.44 65.79,57.66 66.81,56.64 66.81,54.1 67.83,53.09 70.37,53.09 71.89,51.56 IC2.2 73.92,51.56 74.68,50.8 74.68,45.72 74.43,45.47 74.43,44.96 74.68,44.7 74.68,38.35 71.64,35.31 v71.64,33.53
N$17  (via drill 0.3)
  Top 0.254: IC3.13 77.99,31.75 79.51,33.27 R47.2 | v79.76,56.9 78.75,55.88 v69.6,55.88
  Bottom 0.254: R47.2 R49.1 79.51,35.81 78.24,37.08 78.24,49.78 78.3,49.85 78.3,50.61 78.24,50.67 78.24,55.37 v79.76,56.9 | v69.6,55.88 69.6,70.61 68.59,71.63 68.59,74.93 67.32,76.2 IC6.15
N$18  (via drill 0.3)
  Top 0.22: POT8.MID 35.92,21.08 32.77,21.08 32.27,20.57 29.47,20.57 27.19,18.29 v27.19,18.03 | v29.22,55.12 v26.17,55.12
  Bottom 0.22: v27.19,18.03 27.19,21.34 25.41,23.11 25.41,30.48 25.66,30.73 25.66,51.82 28.96,55.12 v29.22,55.12 | v26.17,55.12 26.17,60.45 24.39,62.23 24.39,63.75 22.87,65.28 19.57,65.28 18.93,65.91 18.93,70.48 20.07,71.63 20.92,71.63 IC7.4
N$19  (via drill 0.3)  (1 unrouted)
  Top 0.22: v37.6,73.15 37.35,72.9 35.31,72.9 35.06,72.64 32.46,72.64 29.85,75.25 24.33,75.25 23.12,76.45 21.22,76.45 20.96,76.71
  Bottom 0.22: POT7.MID 37.25,67.41 36.08,68.58 36.08,70.1 37.6,71.63 v37.6,73.15
N$20
  Top 0.22: POT6.MID 35.89,70.61 33.28,70.61 32.84,70.17 22.93,70.17 21.87,69.11 IC7.5
N$21  (via drill 0.3)
  Top 0.22: IC7.1 21.43,79.76 26.42,79.76 27.19,80.52 33.28,80.52 33.98,81.22 37.28,81.22 v37.6,81.53
  Bottom 0.22: v37.6,81.53 37.6,93.65 POT5.MID
N$22  (via drill 0.3)
  Top 0.22: POT4.MID 13.84,21.34 v18.55,21.34 | v30.61,57.72 v28.96,58.93
  Bottom 0.22: v18.55,21.34 19.06,21.84 19.06,28.45 22.17,31.56 22.17,37.27 21.47,37.97 21.47,44.58 22.11,45.21 22.11,50.04 25.41,53.34 26.17,53.34 26.68,53.85 v30.61,57.72 | v28.96,58.93 30.74,60.58 30.74,68.83 30.47,69.11 IC7.12
N$23  (via drill 0.3)
  Top 0.22: v11.44,67.31 11.63,67.5 15.69,67.5 18.74,70.55 30.68,70.55 v31,70.87
  Bottom 0.22: POT3.MID 12.25,66.5 v11.44,67.31 | v31,70.87 31,74.42 28.96,76.45 28.84,76.45 IC7.15
N$24
  Top 0.22: POT2.MID 17.17,74.17 18.3,74.17 19.57,75.44 22.61,75.44 23.86,74.19 IC7.14
N$25  (via drill 0.3)
  Top 0.22: POT1.MID 9.73,96.52 v4.96,96.52 | v6.87,69.34 8.26,67.94 15.44,67.94 18.42,70.93 18.42,71.75 19.57,72.9 26.93,72.9 28.18,71.65 IC7.13
  Bottom 0.22: v4.96,96.52 4.96,94.81 7.12,92.65 7.12,83.31 8.39,82.04 8.39,78.49 8.9,77.98 8.9,71.37 v6.87,69.34
N$26
  Top 0.254: R30.1 57.92,60.71 60.46,58.17 R14.2
  Bottom 0.254: IC2.5 69.1,43.94 68.33,44.7 68.33,47.24 66.3,49.28 66.3,56.39 64.53,58.16 R14.2
N$27
  Top 0.254: POWER.10 POWER.9 82.56,74.17 80.78,74.17 77.99,71.37 D1.A
N$28
  Top 0.254: D1.C 77.73,77.6 77.73,76.45 72.14,70.87 R1.1
N$29
  Top 0.254: D2.A 74.94,67.82 74.43,67.31 R2.1
N$30
  Bottom 0.254: S1.2 41.38,4.83 33.79,4.83 33.03,5.59 33.03,11.18 R55.1
N$31  (via drill 0.6)
  Top 0.254: C6.2 30.74,37.59 v23.63,37.59
  Top 0.6: C6.2 IC1.2
  Bottom 0.254: R4.1 31.88,37.73 C6.2 | v23.63,37.59 22.61,38.62 R5.1
N$33  (via drill 0.6)
  Top 0.254: POWER.2 POWER.1 77.22,64.52 v76.46,65.28
  Bottom 0.254: D2.C 74.94,73.66 76.46,72.14 v76.46,65.28
N$35
  Top 0.254: IC2.4 75.95,46.48 77.22,47.75 83.83,47.75 R23.2
  Top 0.35: R23.2 88.91,46.23 91.45,48.77 R22.1
N$36  (via drill 0.3)
  Top 0.254: IC2.1 68.59,54.1 67.32,55.37 R40.1 | IC5.12 v65.29,36.32
  Bottom 0.254: R40.1 R31.2 63.51,52.83 63,52.32 63,49.28 64.27,48.01 65.03,48.01 65.98,47.05 65.98,41.34 65.29,40.64 v65.29,36.32
N$37
  Top 0.254: R15.2 58.94,50.29 57.41,48.77 53.35,48.77 51.82,50.29 51.82,52.07 52.84,53.09 55.12,53.09 R31.1
  Bottom 0.254: IC2.7 70.62,38.86 67.83,41.66 67.83,47 R15.2
N$38
  Top 0.254: IC2.6 72.91,41.66 77.48,41.66 77.99,42.16 77.99,44.45 78.75,45.21 83.83,45.21 R24.2
  Top 0.35: R24.2 88.91,43.69 91.45,46.23 R23.1
N$39
  Top 0.254: R4.2 23.38,24.63 C5.+ | D3.2 15.76,16.77 R3.1
  Bottom 0.254: R3.1 20.83,25.14 C5.+
N$40  (via drill 0.3)
  Top 0.254: R32.2 IC2.14 80.02,53.85 v76.46,53.85 | v75.7,40.13 66.05,40.13 64.78,38.86 IC5.13
  Bottom 0.254: R41.1 R32.2 | v76.46,53.85 76.46,44.2 75.7,43.43 v75.7,40.13
N$41
  Top 0.254: R16.2 92.34,51.56 93.73,50.16 95.39,50.16 96.02,50.8 96.02,52.59 R32.1
  Bottom 0.254: R16.2 83.32,49.54 83.32,42.42 82.3,41.4 IC2.9
N$42  (via drill 0.3)
  Top 0.22: v15.88,60.33 16.14,60.07 v18.61,60.07 | v24.9,55.12 v24.9,51.88 | v24.9,35.94 19.44,35.94 17.28,33.78 12.71,33.78 IC11.5
  Bottom 0.22: IC7.3 20.92,74.17 20.33,74.17 16.26,70.1 16.26,67.56 15.76,67.06 15.76,60.45 v15.88,60.33 | v18.61,60.07 18.61,56.58 20.07,55.12 v24.9,55.12 | v24.9,51.88 24.9,38.61 25.15,38.35 25.15,36.2 v24.9,35.94
N$43  (via drill 0.3)
  Top 0.22: D8.CATHODE 38.74,85.34 D7.ANODE 34.81,85.34 34.04,84.58 32.27,84.58 31.5,85.34 v31.5,85.85 | v10.99,70.93 10.8,71.12 10.42,71.12 10.17,71.37 10.17,72.64 11.18,73.66 v14.74,73.66 | v14.74,80.01 14.3,80.45 14.3,81.92 14.93,82.55 17.28,82.55 18.3,81.53 24.14,81.53 25.66,83.06 v27.19,83.06 | v13.98,54.36 18.8,54.36 R56.1
  Bottom 0.22: v10.99,70.93 10.99,68.64 11.69,67.94 12.07,67.94 13.47,66.55 C22.1 14.74,64.01 14.74,57.15 13.98,56.39 v13.98,54.36 | v14.74,73.66 v14.74,80.01 | v27.19,83.06 29.22,85.09 30.74,85.09 v31.5,85.85
N$44
  Top 0.35: R25.2 88.91,41.15 91.45,43.69 R24.1
  Bottom 0.254: R25.2 83.06,38.86 IC2.8
N$45  (via drill 0.3)
  Top 0.254: v82.81,60.71 R33.2 72.65,60.71 70.11,63.25 R42.1 66.81,63.25 65.54,61.98 52.59,61.98 50.81,60.2 50.81,48.77 53.09,46.48 IC5.1
  Bottom 0.254: v82.81,60.71 82.81,53.09 81.29,51.56 IC2.13
N$46  (via drill 0.3)
  Top 0.254: v83.83,59.44 68.58,59.44 R17.2
  Bottom 0.254: R33.1 R17.2 | IC2.11 81.54,46.48 82.56,47.5 82.56,51.05 83.83,52.32 v83.83,59.44
N$47
  Top 0.254: R26.2 83.57,40.38 83.57,41.4 81.03,43.94 IC2.10
  Top 0.35: R26.2 88.91,38.61 91.45,41.15 R25.1
N$48  (via drill 0.3)
  Top 0.22: D10.CATHODE 37.73,65.79 D9.ANODE 33.41,65.28 25.28,65.28 v23.63,63.63 | C23.1 12.45,61.47 11.95,61.47 11.69,61.21 v7.37,61.21 | v7.37,55.63 9.41,53.59 18.3,53.59 18.93,52.96 18.93,51.5 20.14,50.29 R57.1
  Bottom 0.22: v7.37,61.21 v7.37,55.63 | v23.63,63.63 23.63,60.71 25.54,58.8 25.54,54.86 20.96,50.29 R57.1
N$49  (via drill 0.3)
  Top 0.254: IC3.2 68.33,32 67.32,32 66.3,33.02 63.51,33.02 63,32.51 v58.43,32.51
  Bottom 0.254: R34.2 58.43,22.35 60.97,24.89 | 60.97,24.89 R43.1 | 60.97,24.89 58.43,27.43 v58.43,32.51 57.67,33.27 57.67,40.89 54.62,43.94 IC5.2
N$50
  Top 0.254: IC3.5 68.33,23.88 67.57,23.88 66.05,22.35 R34.1
  Bottom 0.254: R18.2 R34.1
N$51
  Top 0.254: R27.2 73.67,27.94 72.4,26.67 IC3.4
  Top 0.35: R27.2 82.49,29.4 92.97,29.4 94.5,30.93 R26.1
N$52  (via drill 0.3)
  Top 0.22: D12.CATHODE 37.73,60.71 D11.ANODE | v13.22,48.51 19.56,48.51 R58.1 21.73,47.75 25.79,51.82 25.79,52.32 28.01,54.55 31.19,54.55 31.76,55.12 v33.03,55.12
  Bottom 0.22: v13.22,48.51 13.22,59.44 C24.1 | D11.ANODE 32.77,59.56 32.77,55.37 v33.03,55.12
N$53  (via drill 0.3)
  Top 0.254: R44.1 66.3,21.07 66.3,21.84 67.32,22.86 v71.13,22.86 | IC3.1 65.79,34.29 65.03,35.05 v56.9,35.05
  Bottom 0.254: R35.2 R44.1 | v71.13,22.86 71.13,32.77 69.6,34.29 IC3.1 | v56.9,35.05 56.9,39.37 54.87,41.4 IC5.3
N$54
  Top 0.254: R35.1 56.65,14.48 59.19,11.94 R19.2 62.25,12.45 63.64,13.84 63.64,14.86 67.57,18.8 68.33,18.54 68.33,18.8 IC3.7
N$55
  Bottom 0.254: IC11.1 4.07,42.16 D13.ANODE
N$56  (via drill 0.3)
  Top 0.254: R28.2 v73.41,25.4
  Top 0.35: R28.2 84.59,25.4 87.13,27.94 R27.1
  Bottom 0.254: v73.41,25.4 73.41,24.13 70.87,21.59 IC3.6
N$57
  Top 0.254: R36.2 87.89,17.53 85.35,20.07 R45.1 | IC3.14 73.67,36.83 68.84,36.83 68.08,37.59 55.89,37.59 54.62,38.86 IC5.4
  Bottom 0.254: IC3.14 77.73,34.29 80.02,32 82.05,32 82.81,31.24 82.81,20.83 82.05,20.07 R45.1
N$58
  Top 0.254: R36.1 76.96,21.59 IC3.9
  Bottom 0.254: R20.2 R36.1
N$59
  Top 0.35: R29.2 84.59,22.86 87.13,25.4 R28.1
  Bottom 0.254: IC3.8 76.72,19.05 80.53,22.86 R29.2
N$60
  Top 0.254: R61.1 1.65,38.73 IC11.2
  Bottom 0.254: R59.2 1.53,50.29 3.06,48.77 3.06,46.74 1.53,45.21 R61.1
N$61  (via drill 0.3)
  Top 0.22: v5.34,80.26 8.39,83.31 IC4.5 | D7.CATHODE 41.73,84.9 v43.51,84.9 | D9.CATHODE 41.66,64.39 41.66,62.1 D11.CATHODE 39,61.98 33.03,61.98 31.25,60.2 20.07,60.2 18.3,58.42 5.34,58.42 2.8,60.96 v2.8,64.26
  Top 0.254: R61.2 3.94,50.42 D13.CATHODE
  Bottom 0.22: R60.1 2.8,54.35 2.8,60.45 2.29,60.96 2.29,63.75 v2.8,64.26 2.61,64.52 2.61,72.58 5.09,75.18 5.09,77.6 5.34,77.85 v5.34,80.26 | v43.51,84.9 43.38,84.77 43.38,80.64 40.71,77.98 40.71,71.75 41.54,70.93 41.54,68.2 40.27,66.93 D9.CATHODE
  Bottom 0.254: D13.CATHODE R60.1
N$62
  Bottom 0.254: EXPAND-CHANNEL.4 69.48,104.62 69.48,101.6 67.32,99.44 IC10.2
N$63
  Bottom 0.254: EXPAND-CHANNEL.6 64.47,104.65 62.49,104.65 61.86,104.01 61.86,102.3 60.65,101.09 58.68,101.09 57.16,99.57 IC10.6
N$64
  Bottom 0.254: EXPAND-CHANNEL.5 62.24,99.88 IC10.4
N$65  (via drill 0.3)
  Top 0.254: v55.89,101.6 66.56,101.6 68.23,103.27 EXPAND-CHANNEL.3
  Bottom 0.254: IC10.10 54.87,90.17 54.87,91.95 55.89,92.96 v55.89,101.6
N$66
  Bottom 0.254: EXPAND-CHANNEL.7 63,103.18 63,102.36 60.97,100.33 60.97,93.98 59.7,92.71 IC10.12
N$67  (via drill 3.2 pad 6)
  other vias: 46,16.75
N$68  (via drill 3.2 pad 6)
  other vias: 3.5,106.5
N$69  (via drill 3.2 pad 6)
  other vias: 53,106.5
N$70  (via drill 3.2 pad 6)
  other vias: 95.5,16.25
N$93
  Top 0.254: IC11.7 C25.1
  Bottom 0.254: C25.1 R65.1
OUT1  (via drill 0.3)  (1 unrouted)
  Top 0.22: PCB1-CON2.2 45.89,76.96 45.22,76.96 43.7,78.49 v34.81,78.49
  Bottom 0.22: v34.81,78.49 34.81,74.17 32.77,72.14 32.77,60.45 32.27,59.94 32.27,54.61 33.79,53.09 33.79,47.75 27.7,41.66 R65.2 | OUT.TIPT 27.95,4.7 27.95,22.1 26.8,23.24 26.8,34.67 26.61,34.86 26.61,37.78 R64.2
  Bottom 0.254: R64.2 R65.2
OUT2  (via drill 0.3)
  Top 0.254: v90.43,101.35 85.97,101.35 EXPAND-16STEP.5
  Bottom 0.254: PCB2-CON2.2 95.61,76.96 96.78,76.96 97.8,77.98 97.8,81.03 93.23,85.6 93.23,91.19 89.92,94.49 89.92,100.84 v90.43,101.35
PE1  (via drill 0.3)
  Top 0.22: v39.89,55.88 42.43,55.88 v42.68,55.63
  Top 0.254: R52.2 30.5,16.26 37.09,16.26 v37.6,15.75 40.65,12.7 40.65,4.32 43.07,1.9 S1.1
  Bottom 0.22: PCB1-CON1.8 43.82,84.18 43.82,74.8 41.92,72.9 41.92,67.82 41.47,67.37 41.47,57.47 v39.89,55.88 | v42.68,55.63 40.65,53.59 40.65,48.51 42.05,47.12 42.05,43.62 40.84,42.42 40.84,31.05 43.95,27.94 43.95,24.13 42.17,22.35 42.17,20.32 v37.6,15.75
PE2  (via drill 0.3)
  Top 0.254: PCB2-CON1.8 94.99,85.85 93.23,85.85 91.45,84.07 79.26,84.07 77.48,82.3 71.89,82.3 v71.13,81.53
  Bottom 0.254: v71.13,81.53 69.86,82.8 IC6.1
PRESET_A
  Bottom 0.254: IC6.4 62.24,80.01 63.51,78.74 63.51,75.44 65.03,73.91 65.03,66.8 61.98,63.75 61.98,50.55 59.19,47.75 59.19,29.72 60.21,28.7 IC5.9
PRESET_B
  Bottom 0.254: IC6.12 59.7,75.69 61.48,73.91 61.48,64.77 60.97,64.26 60.97,51.05 58.17,48.26 58.17,46.23 57.16,45.21 52.08,45.21 51.57,44.7 51.57,32.51 52.84,31.24 IC5.7
PRESET_C  (via drill 0.3)
  Top 0.254: v58.43,36.07 56.65,36.07 54.36,33.78 IC5.6
  Bottom 0.254: IC6.13 62.24,75.69 64.27,73.66 64.27,66.8 61.48,64.01 61.48,50.8 58.68,48.01 58.68,36.32 v58.43,36.07
RESET1
  Top 0.22: PCB1-CON1.6 45.22,91.44 43.44,93.22 43.44,94.23 42.17,95.5 34.3,95.5 33.85,95.31 19.76,95.31 19.18,94.74 17.47,94.74 14.42,97.79 8.26,97.79 8.01,97.54 6.74,97.54 D5.CATHODE
  Bottom 0.22: D5.CATHODE 2.8,98.93 2.8,92.2 2.61,92.01 2.61,82.11 2.8,81.92 2.8,79.76 4.07,78.49 R53.2
RESET2  (via drill 0.3)
  Top 0.254: v92.46,96.01 89.42,96.01 88.4,97.03 87,97.03 85.48,98.55 D6.CATHODE | v50.55,100.58 82.56,100.58 v83.32,101.35
  Bottom 0.254: PCB2-CON1.6 94.24,91.44 91.96,93.73 91.96,95.5 v92.46,96.01 | IC6.9 50.55,78.74 50.55,85.34 50.05,85.85 50.05,97.03 50.55,97.54 v50.55,100.58 | v83.32,101.35 84.97,99.69 D6.CATHODE
RESET-EXP
  Bottom 0.254: D6.ANODE 78.68,98.55 82.75,102.62 82.75,104.63 EXPAND-16STEP.6 84.03,105.87 86.11,107.95 90.43,107.95 91.19,107.19 91.19,98.56 R10.2
STEP1
  Top 0.22: L1.A 18.8,105.32 18.8,103.12 19.18,102.74 30.11,102.74 30.61,102.23 30.61,97.92 29.22,96.52 28.69,96.52 IC9.13
STEP2  (via drill 0.3)
  Top 0.22: v18.36,95.82 18.36,96.33 19.69,97.66 27.29,97.66 IC9.14
  Bottom 0.22: L2.A 20.98,83.2 23.12,85.34 23.12,87.88 22.8,88.2 22.8,89.6 22.36,90.04 19.69,90.04 18.87,90.87 18.87,95.31 v18.36,95.82
STEP3  (via drill 0.3)
  Top 0.22: L3.A 20.98,57.8 20.58,57.4 8.39,57.4 v8.14,57.15 | v8.14,71.88 10.68,74.42 v13.22,74.42 | v18.04,88.65 17.79,88.65 16.01,90.42 16.01,95.31 v15.25,96.08 | v15.25,98.81 18.04,98.81 19.44,100.2 27.29,100.2 IC9.15
  Bottom 0.22: v8.14,57.15 8.14,66.29 5.85,68.58 5.85,69.6 v8.14,71.88 | v13.22,74.42 13.98,75.18 13.98,81.79 14.49,82.3 14.49,88.9 15.76,90.17 16.26,90.17 17.79,88.65 v18.04,88.65 | v15.25,96.08 v15.25,98.81
STEP4  (via drill 0.3)
  Top 0.22: IC9.12 30.74,91.67 30.74,90.68 31.25,90.17 32.77,90.17 33.54,89.41 33.54,86.36 32.77,85.6 v32.77,85.22 | v28.84,57.72 29.54,57.09 31.19,57.09 v31.38,57.28 | v28.2,45.47 27.69,45.97 v24.14,45.97 | v23.88,35.31 23.04,35.31 L4.A
  Bottom 0.22: v32.77,85.22 33.09,84.9 33.09,78.68 34.04,77.72 34.04,75.18 33.54,74.68 33.03,74.68 31.76,73.41 31.76,60.96 31.25,60.45 31.25,60.13 v28.84,57.72 | v31.38,57.28 31,56.9 31,55.37 30.68,55.05 30.68,47.18 28.96,45.47 v28.2,45.47 | v24.14,45.97 24.14,38.61 24.65,38.1 24.65,36.83 23.88,36.07 v23.88,35.31
STEP5
  Top 0.22: IC9.1 23.17,106.24 44.78,106.24 45.98,107.44 L5.A
STEP6
  Top 0.22: L6.A 43.5,82.75 42.17,84.07 40.77,84.07 37.98,86.87 36.08,86.87 34.04,88.9 34.04,92.96 32.01,94.93 22.09,94.93 IC9.5
STEP7  (via drill 0.3)
  Top 0.22: L7.A 46.83,58 48.65,59.82 48.65,79.88 47.76,80.77 40.39,80.77 39.38,79.76 34.55,79.76 v34.3,80.01 | v35.57,104.14 34.3,105.41 25.47,105.41 v23.44,103.38
  Bottom 0.22: v34.3,80.01 33.54,80.77 33.54,85.85 35.82,88.14 35.82,89.15 34.04,90.93 34.04,92.71 33.54,93.22 33.54,94.74 35.57,96.77 v35.57,104.14 | IC9.2 21.53,101.47 v23.44,103.38
STEP8  (via drill 0.3)
  Top 0.22: L8.A 45.45,33.25 44.46,32.26 32.77,32.26 31.5,30.99 29.73,30.99 27.95,29.21 5.09,29.21 4.83,29.46 3.56,29.46 v2.29,30.73 | v5.85,92.96 5.85,93.47 7.37,95 v7.37,95.5 | IC9.4 19.94,96.39 18.74,95.19 17.79,95.19 14.17,98.81 7.88,98.81 v7.37,98.3
  Bottom 0.22: v2.29,30.73 2.8,31.24 2.8,45.21 5.34,47.75 5.34,55.37 3.31,57.4 3.31,60.96 2.8,61.47 2.8,62.99 3.44,63.63 3.44,65.02 2.99,65.47 2.99,72.33 5.6,74.93 5.6,77.47 6.36,78.23 6.36,80.52 5.34,81.53 4.33,81.53 2.99,82.87 2.99,91.69 3.75,92.46 5.34,92.46 v5.85,92.96 | v7.37,95.5 v7.37,98.3
TRIGS1  (via drill 0.3)
  Top 0.22: IC4.7 v7.88,88.39 | PCB1-CON2.4 45.89,71.88 44.46,71.88 42.17,74.17 35.57,74.17 34.55,73.15 32.52,73.15 30.04,75.63 24.96,75.63 22.61,77.98 19.31,77.98 18.55,78.74 v9.09,78.74
  Bottom 0.22: R62.1 8.38,108.21 9.15,107.44 9.15,95.76 8.14,94.74 8.14,93.47 8.9,92.71 8.9,89.41 v7.88,88.39 9.09,87.19 v9.09,78.74
TRIGS2  (via drill 0.3)
  Top 0.254: PCB2-CON2.4 93.08,71.77 84.21,80.64 80.4,80.64 80.21,80.83 76.53,80.83 75.95,80.26 63.51,80.26 62.87,80.9 54.24,80.9 53.86,81.28 v52.33,81.28
  Bottom 0.22: v52.33,81.28 53.16,82.11 53.16,87.06 52.08,88.14 IC10.9
U/D1  (via drill 0.3)
  Top 0.22: v39.89,46.74 39.89,46.48 41.16,45.21 41.16,43.69 39.38,41.91 v38.93,41.91
  Top 0.254: S1.3 37.43,17.02 v37.35,17.02 32.27,17.02 R51.2
  Bottom 0.22: PCB1-CON1.7 42.93,85.83 42.93,81.03 40.27,78.36 40.27,71.5 41.16,70.61 41.16,68.58 38.87,66.29 38.87,47.75 v39.89,46.74 | v38.93,41.91 39.12,41.72 39.12,21.08 38.49,20.45 38.49,18.16 v37.35,17.02
U/D2  (via drill 0.3)
  Top 0.254: PCB2-CON1.7 93.99,88.9 92.21,90.68 90.94,90.68 89.42,89.15 85.61,89.15 83.07,86.61 76.46,86.61 75.19,85.34 73.16,85.34 71.38,83.57 71.38,83.06 69.86,81.53 v54.62,81.53
  Bottom 0.254: v54.62,81.53 IC6.10

## Text on the board
tPlace: PCB2 | feline supplement 127
bPlace: STRIPE | JUMPER | STRIPE | PCB1 | Roll Your Own | ljunggrenaudio.com 2015 | -12V | VC Sequencer / 1.5 TH | Pb | VC Sequencer / 1.5 TH | ljunggrenaudio.com 2015 | Roll Your Own | Pb